# Altium PCB Panel 25Up RGB MCU Badge.PcbDoc
Units mm, origin at the board's own origin, x right, y up, seen from the top; angles counter-clockwise.
Board outline 100 x 100 mm, 4 copper layers (Top Layer, Layer 1, Layer 2, Bottom Layer), stack 0.771 mm thick; 14 components, 18 nets, 18 pads, 0 vias.
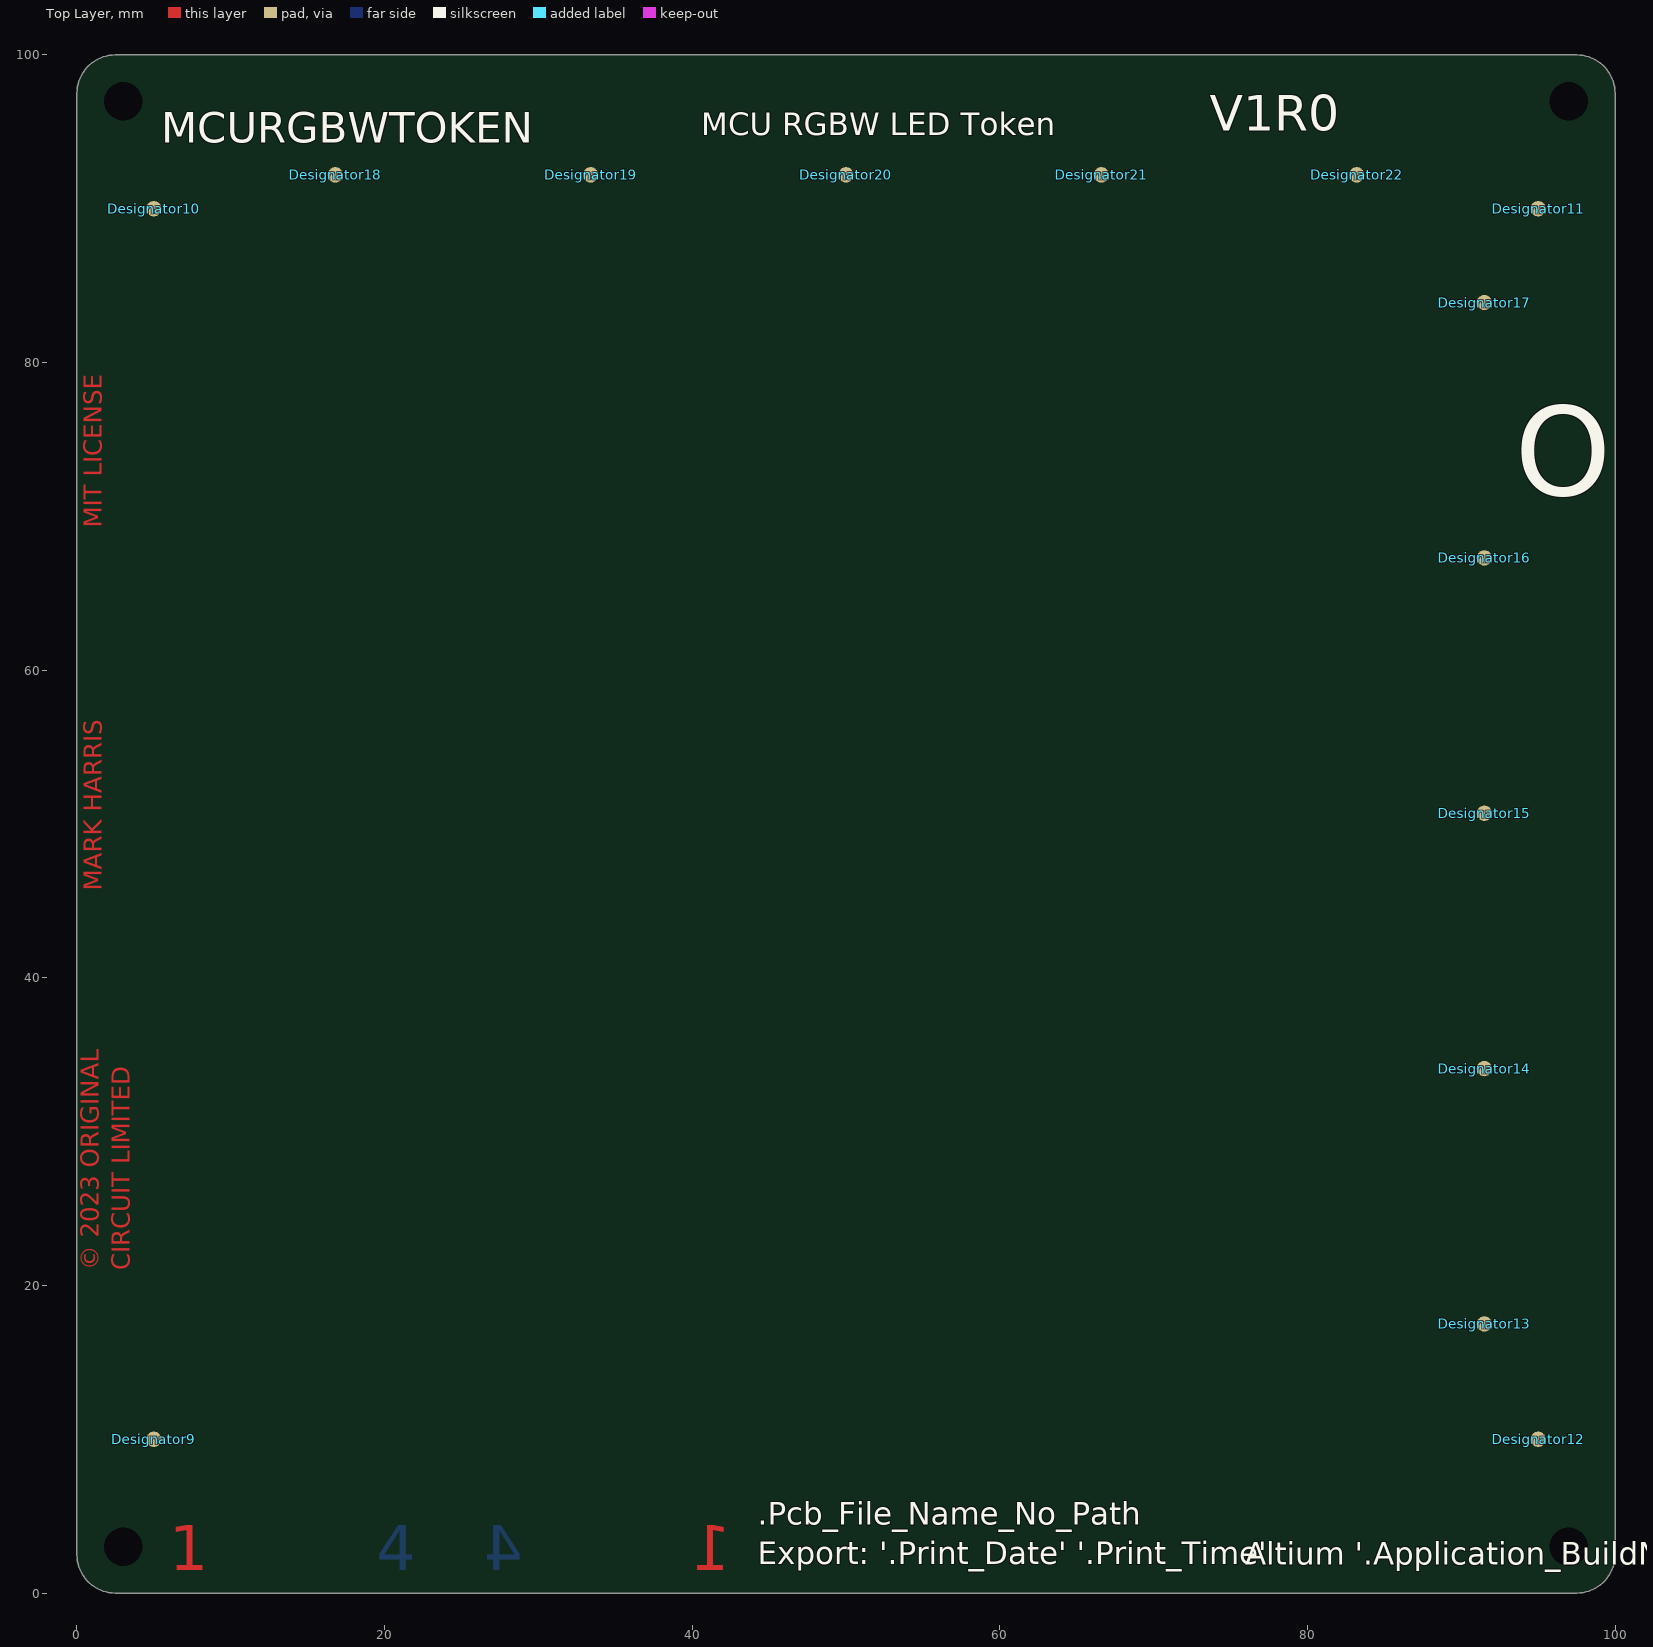
[diagram p0: Top Layer view]
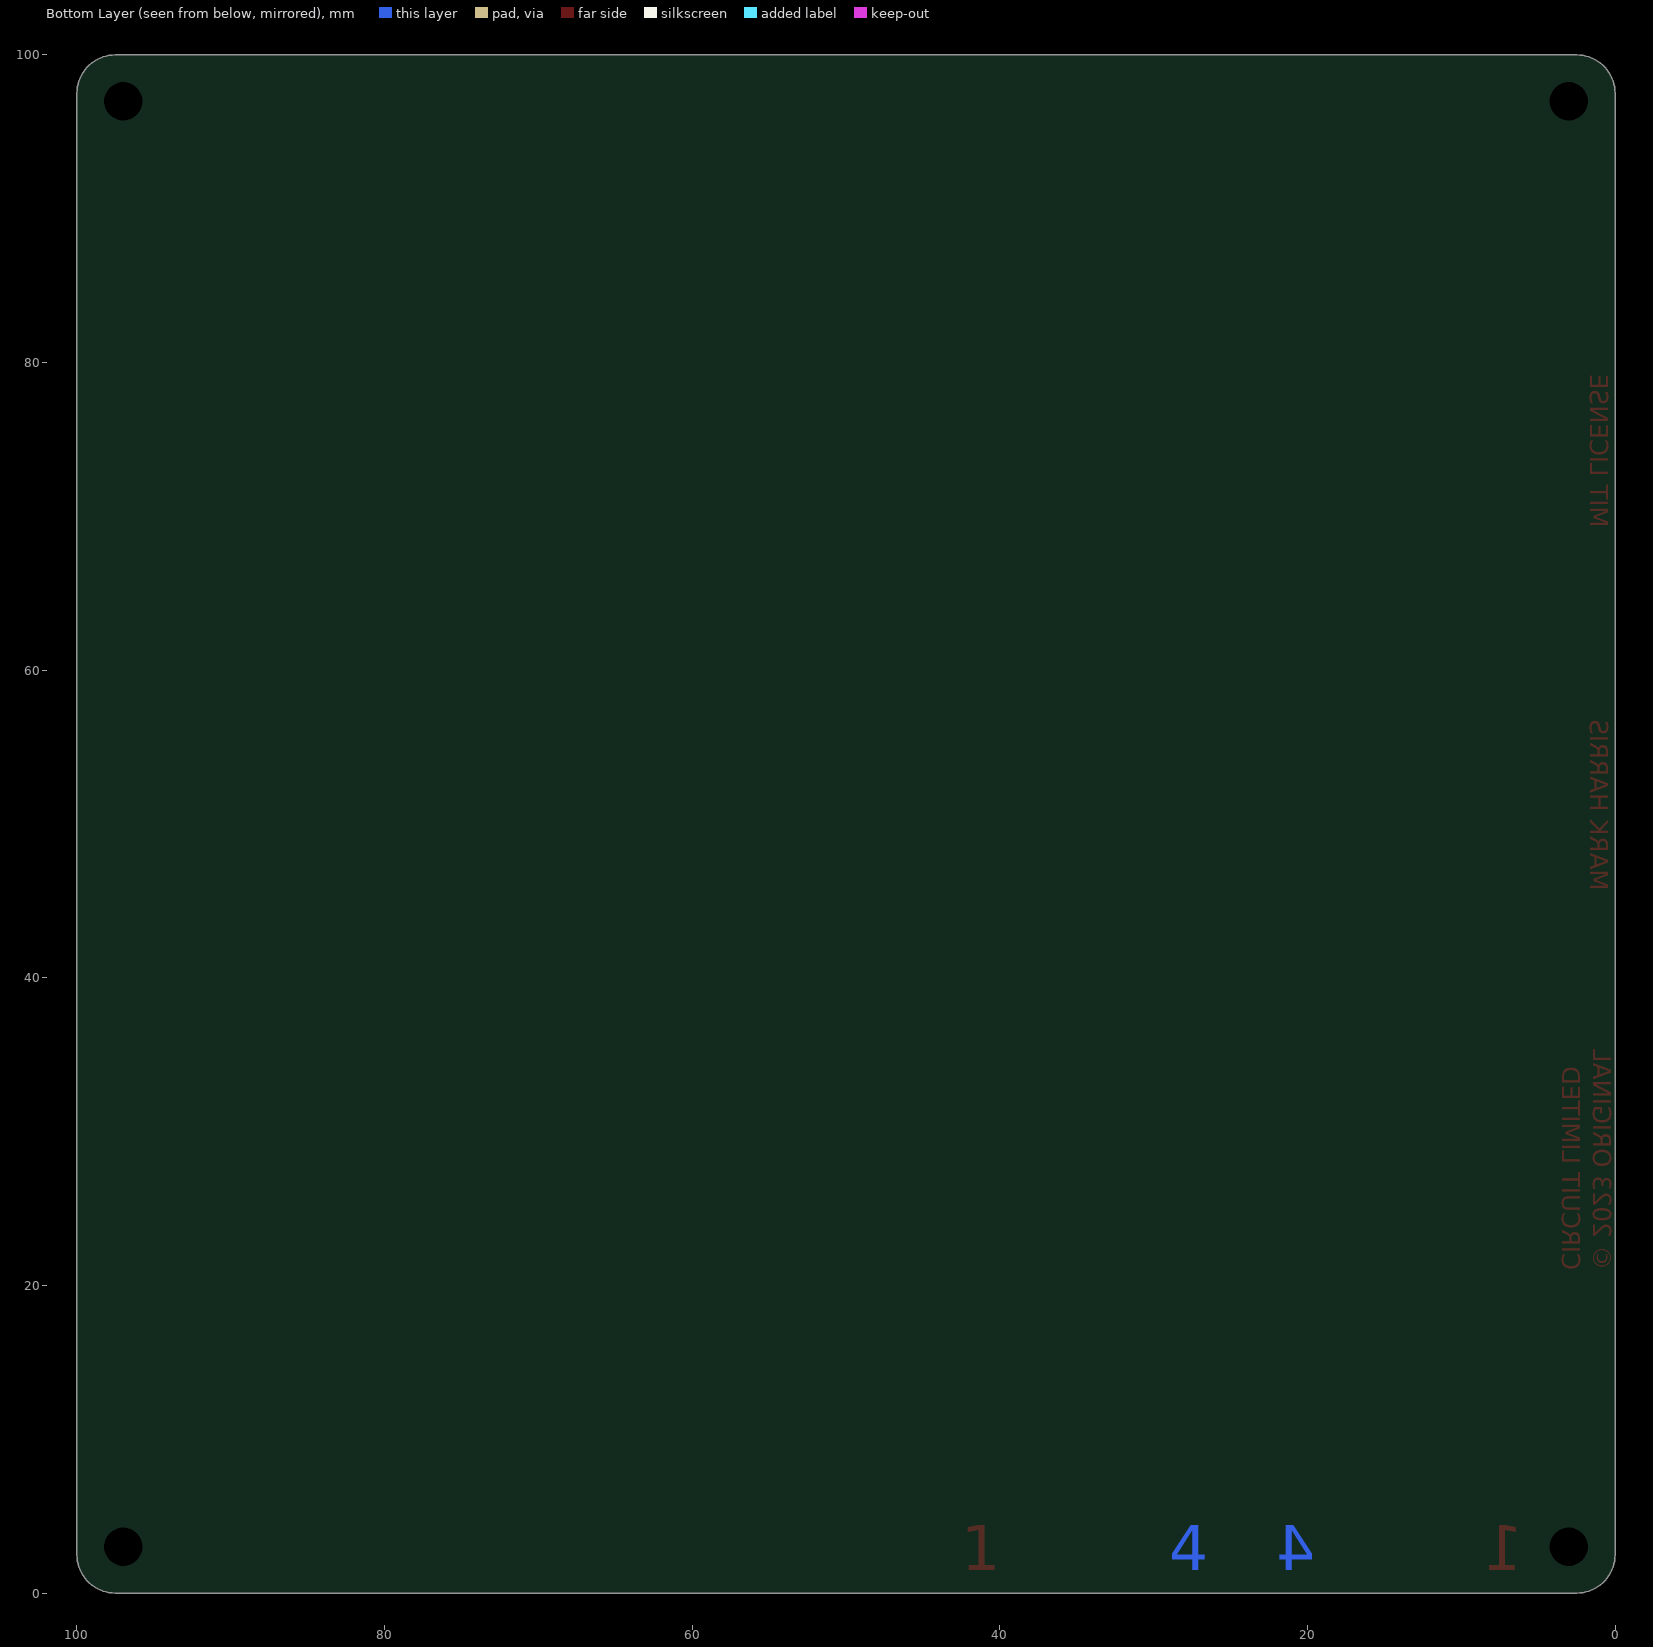
[diagram p1: Bottom Layer view, seen from below]
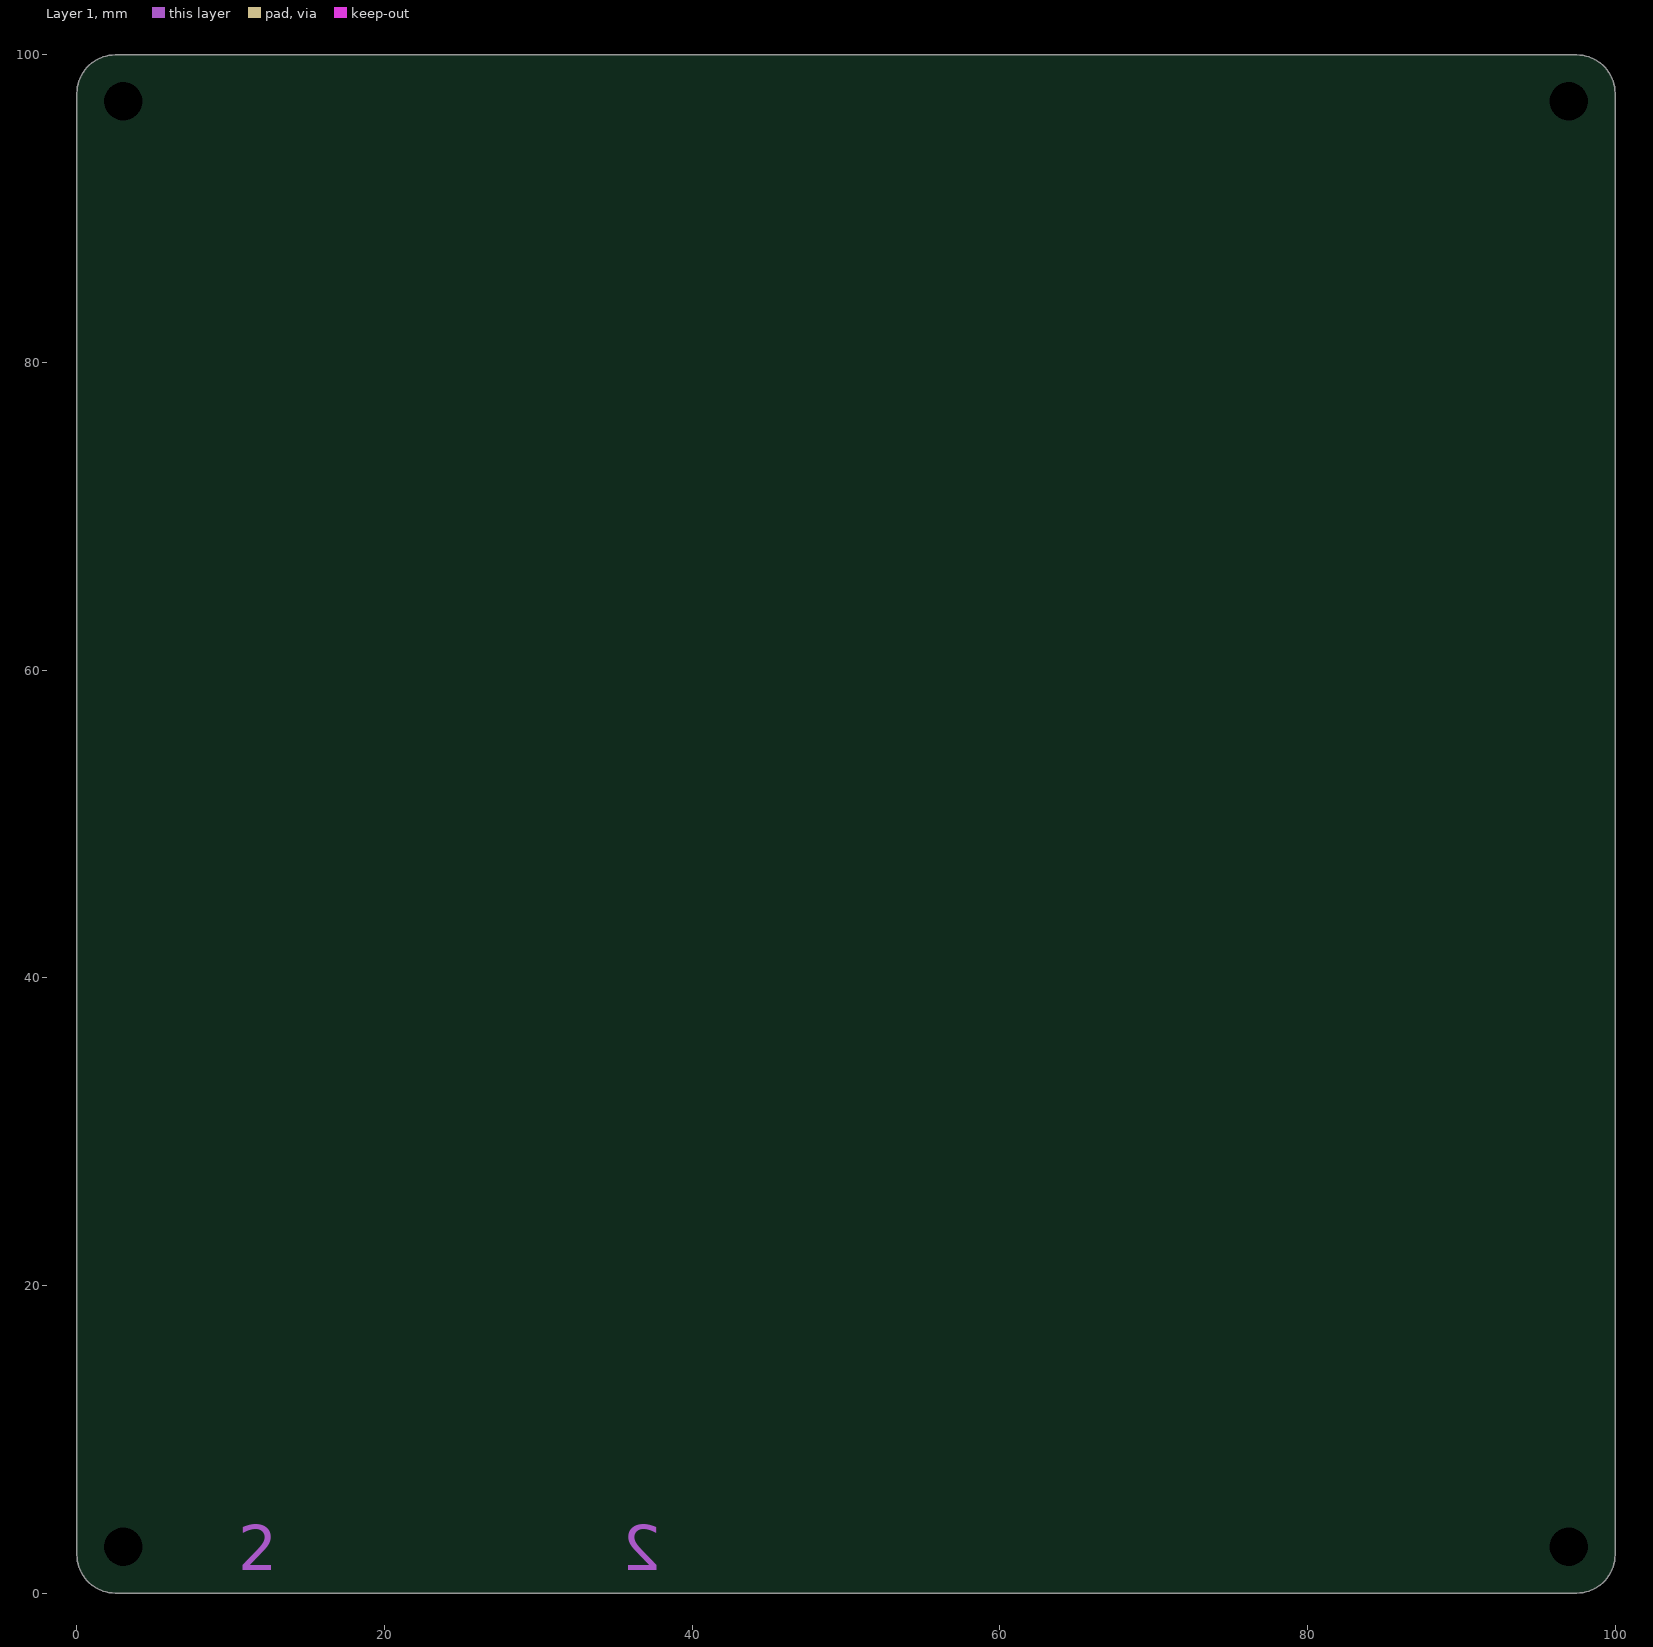
[diagram p2: Layer 1]
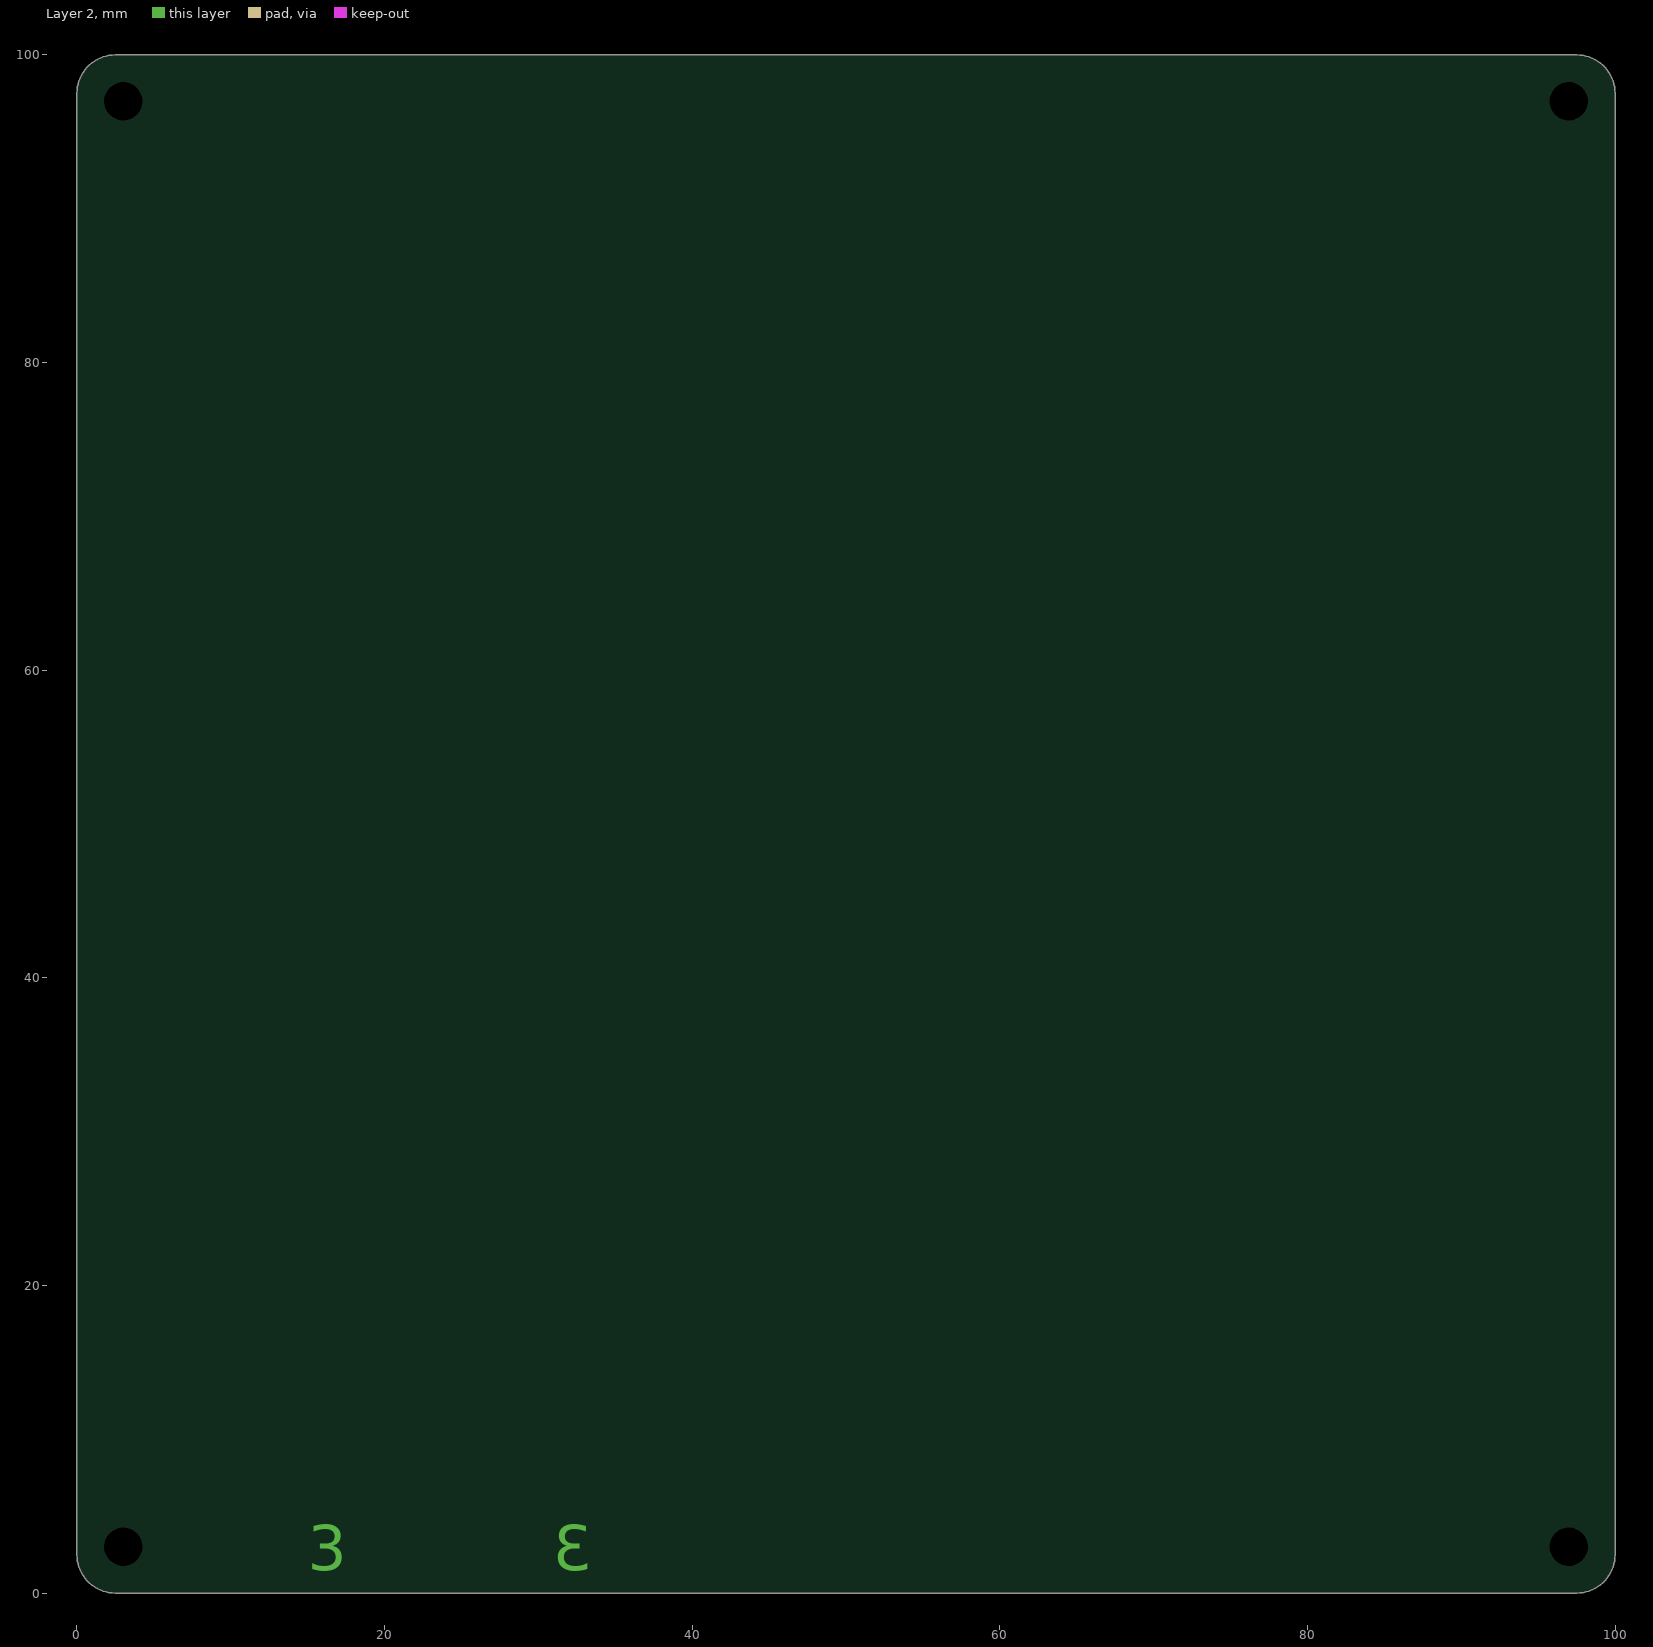
[diagram p3: Layer 2]

## Layer stack, top to bottom
Top Solder: solder mask 0.0102, Solder Resist, Dk 3.8
Top Layer: signal copper 0.035
Dielectric 2: prepreg 0.2104, PP-006, Dk 4.4
Layer 1: signal copper 0.0152
Dielectric 1: dielectric 0.25, FR-4, Dk 4.6
Layer 2: signal copper 0.0152
Dielectric 3: prepreg 0.2104, PP-006, Dk 4.4
Bottom Layer: signal copper 0.035
Bottom Solder: solder mask 0.0102, Solder Resist, Dk 3.8

## Board outline
2.5,0 cw(c2.5,2.5) 0,2.5 0,97.5 cw(c2.5,97.5) 2.5,100 97.5,100 cw(c97.5,97.5) 100,97.5 100,2.5 cw(c97.5,2.5) 97.5,0

## Design rules (kind name [scope] priority, off if disabled: settings)
Clearance [All] p1: gap=0.09 ignorepadtopadclearanceinfootprint=FALSE except(0.2: Arc-THPad Track-THPad SMDPad-THPad; 0.5: THPad-THPad)
ComponentClearance [All] p1: gap=0.254 collisioncheckmode=3 verticalgap=0.254 showdistances=TRUE
MinimumSolderMaskSliver [All] p1: minsoldermaskwidth=0.1
PlaneClearance [All] p1: clearance=0.2
PolygonConnect [All] p1: connectstyle=Direct reliefconductorwidth=0.254 reliefentries=4 polygonreliefangle="90 Angle" airgapwidth=0.254
RoutingVias [All] p1: holewidth=0.3 width=0.6 viastyle="Through Hole" minholewidth=0.15 minwidth=0.45 maxholewidth=6.3 maxwidth=6.6
SilkToSilkClearance [All] p1: silktosilkclearance=-3
SilkToSolderMaskClearance [IsPad] p1: minsilkscreentomaskgap=-3 clearancetoexposedcopper=TRUE
SolderMaskExpansion SolderMaskExpansion_Via [IsVia] p1: expansion=0.102 istentingtop=TRUE
SolderMaskExpansion [All] p2: expansion=0.05 istentingtop=FALSE
Width [All] p1: maxlimit=3 minlimit=0.09 preferedwidth=0.2
25 further rules are at their usual default settings.

## Components (designator, comment, footprint, x,y, rotation, side; value= is the part's Value field where it differs from the comment)
Designator9 "Comment" Fiducial-1mm 5,10 r0 top
Designator10 "Comment" Fiducial-1mm 5,90 r0 top
Designator11 "Comment" Fiducial-1mm 95,90 r0 top
Designator12 "Comment" Fiducial-1mm 95,10 r0 top
Designator13 "Comment" Fiducial-1mm 91.5,17.5 r0 top
Designator14 "Comment" Fiducial-1mm 91.5,34.1 r0 top
Designator15 "Comment" Fiducial-1mm 91.5,50.7 r0 top
Designator16 "Comment" Fiducial-1mm 91.5,67.3 r0 top
Designator17 "Comment" Fiducial-1mm 91.5,83.9 r0 top
Designator18 "Comment" Fiducial-1mm 16.8,92.2 r90 top
Designator19 "Comment" Fiducial-1mm 33.4,92.2 r90 top
Designator20 "Comment" Fiducial-1mm 50,92.2 r90 top
Designator21 "Comment" Fiducial-1mm 66.6,92.2 r90 top
Designator22 "Comment" Fiducial-1mm 83.2,92.2 r90 top

## Footprints (in the part's own frame and the unit in brackets; to place one, negate y for a bottom-side part, rotate by r counter-clockwise, add the part's x,y. Pads: shape width x height; smd on the part's side, far side on the other; paste and mask are expansions set on the pad)
Fiducial-1mm [mm]
  round 1 smd paste-1 mask+0.5: F(0,0)
  Top Layer pour cut-out: -1,0 -0.924,0.383 -0.707,0.707 -0.383,0.924 0,1 0,1 0.383,0.924 0.707,0.707 0.924,0.383 1,0 1,0 0.924,-0.383 0.707,-0.707 0.383,-0.924 0,-1 0,-1 -0.383,-0.924 -0.707,-0.707 -0.924,-0.383 -1,0

## Part data
Designator9 Designator10 Designator11 Designator12 Designator13 Designator14 Designator15 Designator16 Designator17 Designator18 Designator19 Designator20 Designator21 Designator22: library part 1909763-1

## Free pads (board coordinates)
  round 0 hole 2.5 paste-2539.97: M(3,3) M(3,97) M(97,3) M(97,97)

## Nets (pads, with @x,y where several pads share a name; then routed paths per layer and width w, separated by ;. In a path a pad name is that pad's centre, name@x,y a point inside that pad or via, vN(x,y) a via of type N, cw(c..) or ccw(c..) an arc to the next point about the centre after c; other vN are vias at no path point)
5VO: 
9V: 
D5V: 
DGND: 
IN_USB_DN: 
IN_USB_DP: 
NetJ1_A5: 
NetJ1_B5: 
NetJ2_A5: 
NetJ2_B5: 
OUT_USB_DN: 
OUT_USB_DP: 
U5V: 
UGND: 
VDD1: 
VDD2: 
XI: 
XO: 
pads on no net: Designator9.F Designator10.F Designator11.F Designator12.F Designator13.F Designator14.F Designator15.F Designator16.F Designator17.F Designator18.F Designator19.F Designator20.F Designator21.F Designator22.F

## Other copper
Top Layer:
  text "MIT LICENSE" at 2.003,69.25 h2 r90
  text "MARK HARRIS" at 2.003,45.65 h2 r90
  text "© 2023 ORIGINAL  / CIRCUIT LIMITED" at 3.812,21 h2 r90
  text "1" at 6,0.5 h5
  text "1" at 42.5,0.5 h5
Layer 1:
  text "2" at 10.5,0.5 h5
  text "2" at 38,0.5 h5
Layer 2:
  text "3" at 15,0.5 h5
  text "3" at 33.5,0.5 h5
Bottom Layer:
  text "4" at 19.5,0.5 h5
  text "4" at 29,0.5 h5

## Silkscreen, mask and mechanical layers (free items; w line width, h text height)
Top Overlay:
  text "MCURGBWTOKEN" at 5.5,94.3 h2
  text "MCU RGBW LED Token" at 40.6,94.3 h2.5
  text "V1R0" at 73.65,94.3 h4
  text "O" at 93.488,69.435 h10
  text ".Pcb_File_Name_No_Path" at 44.25,3.943 h2.5
  text "Export: '.Print_Date' '.Print_Time'" at 44.25,1.383 h2.5
  text "Altium '.Application_BuildNumber'" at 75.95,1.343 h2.5
Top Solder:
  rectangle: 5.5,0.1 43,5.5
  text "MIT LICENSE" at 2.003,69.25 h2 r90
  text "MARK HARRIS" at 2.003,45.65 h2 r90
  text "© 2023 ORIGINAL  / CIRCUIT LIMITED" at 3.812,21 h2 r90
Bottom Solder:
  rectangle: 5.5,0.1 43,5.5
Board Shape:
  the board outline again, w0.2
Route Tool Path:
  text "ROUTE MILLING LAYER" at 13.254,102.001 h4

## Panel: embedded boards
"RGB Mcu Badge.PcbDoc" at 9.3,10, 5 rows x 5 columns, spacing 16.6 x 16.6, rotation 0